# Altium PCB PCBkurs.PcbDoc
Units mm, origin at the board's own origin, x right, y up, seen from the top; angles counter-clockwise.
Board outline 62.5 x 36 mm, 2 copper layers (Top Layer, Bottom Layer), stack 1.571 mm thick; 26 components, 22 nets, 154 pads, 21 vias.
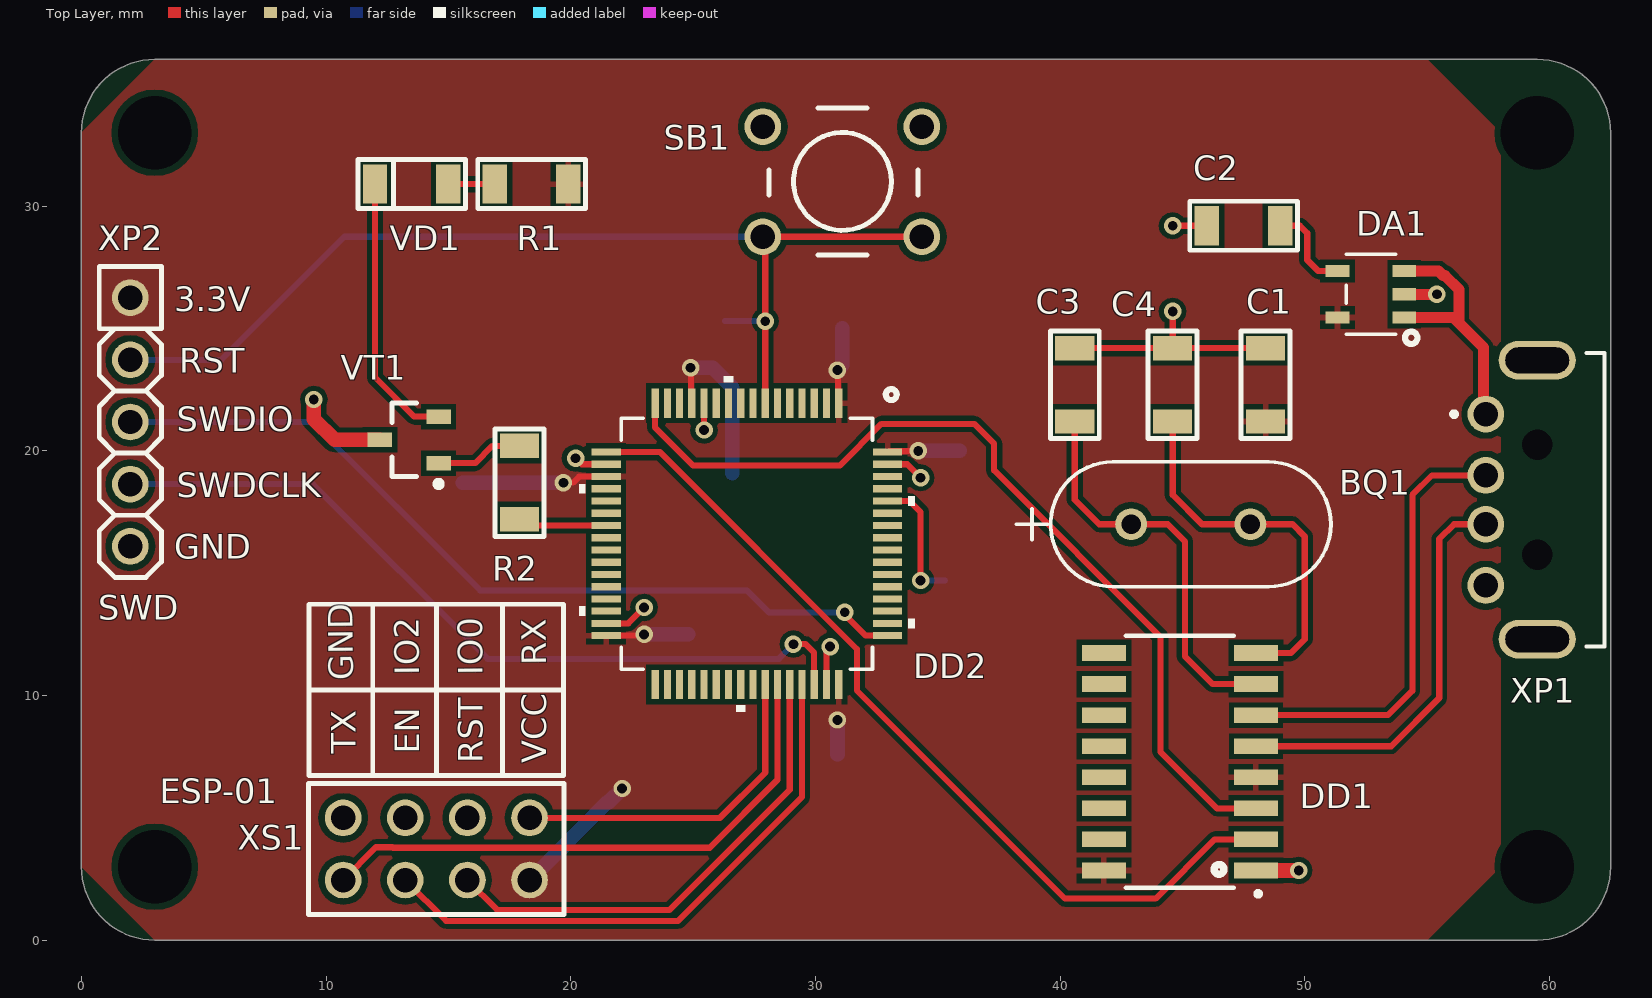
[diagram p0: Top Layer view]
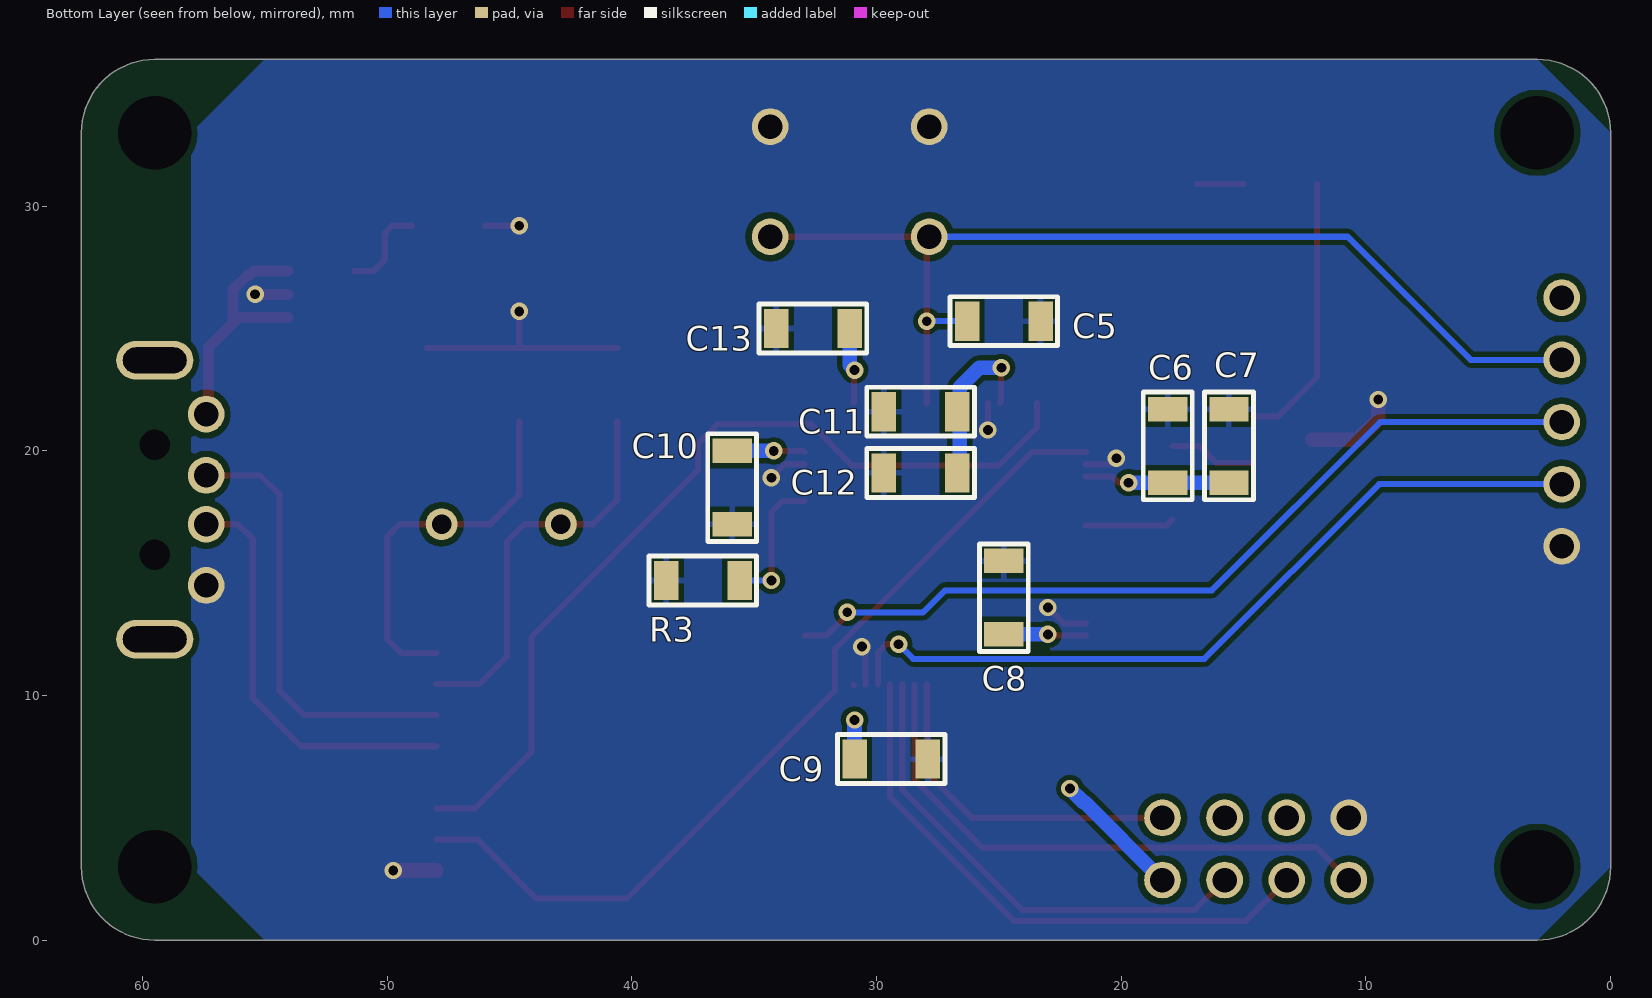
[diagram p1: Bottom Layer view, seen from below]
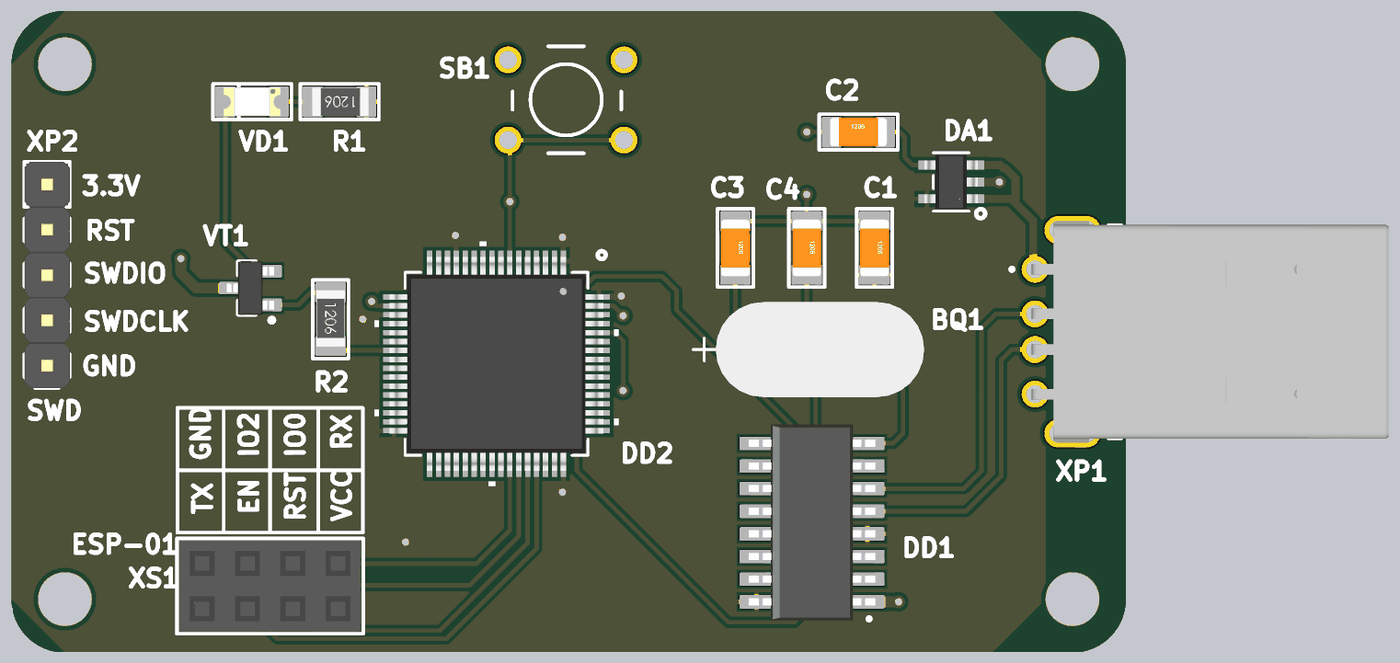
[diagram p2: 3D render of the assembled board from above, using the file's embedded part models]
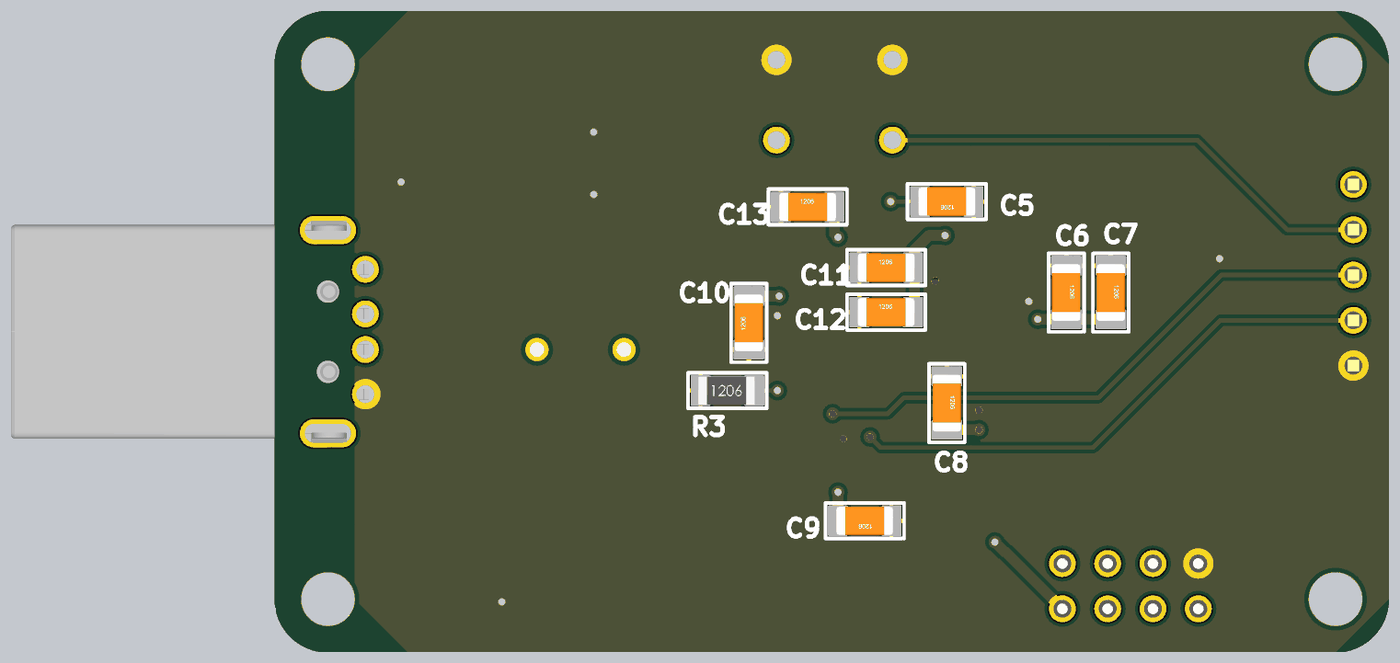
[diagram p3: 3D render of the assembled board from below, using the file's embedded part models]

## Layer stack, top to bottom
Top Solder: solder mask 0.0102, Solder Resist, Dk 3.5
Top Layer: signal copper 0.0356
Dielectric 1: dielectric 1.5, FR-4, Dk 4.8
Bottom Layer: signal copper 0.0356
Bottom Solder: solder mask 0.0102, Solder Resist, Dk 3.5

## Board outline
3,0 cw(c3,3) 0,3 0,33 cw(c3,33) 3,36 59.5,36 cw(c59.5,33) 62.5,33 62.5,3 cw(c59.5,3) 59.5,0

## Design rules (kind name [scope] priority, off if disabled: settings)
Clearance [All] p1: gap=0.195 ignorepadtopadclearanceinfootprint=FALSE except(0.21: SMDPad-Fill SMDPad-Poly SMDPad-Region; 0.255: THPad-Fill THPad-Poly THPad-Region THPad-Hole)
PasteMaskExpansion [All] p1: expansion=0.06
PolygonConnect [All] p1: thpad.connectstyle=Direct thpad.reliefconductorwidth=0.254 thpad.reliefentries=4 thpad.polygonreliefangle="90 Angle" thpad.airgapwidth=0.254 smdpad.connectstyle=Relief smdpad.reliefconductorwidth=0.25 smdpad.reliefentries=4 smdpad.polygonreliefangle="90 Angle" smdpad.airgapwidth=0.21 via.connectstyle=Direct via.reliefconductorwidth=0.254 via.reliefentries=4 via.polygonreliefangle="90 Angle" via.airgapwidth=0.254
RoutingVias [All] p1: holewidth=0.6 width=0.4 viastyle="Through Hole" minholewidth=0.6 minwidth=0.4 maxholewidth=0.6 maxwidth=0.4
SolderMaskExpansion [All] p1: expansion=0.1
Width [All] p1: maxlimit=0.6 minlimit=0.25 preferedwidth=0.45 minimp=50.000000 maximp=50.000000 favimp=50.000000
29 further rules are at their usual default settings.

## Components (designator, comment, footprint, x,y, rotation, side; value= is the part's Value field where it differs from the comment)
BQ1 "12МГц" XTAL_HC49S_MTC 42.9,17 r0 top
C1 "Ceramic capacitor, 2.2мкФ, X7R, ±10%, 50V, 1206, -55...+125°C" "CAP: 1206" 48.4,22.7 r270 top value=2.2мкФ
C2 "Ceramic capacitor, 470пФ, X7R, ±10%, 50V, 1206, -55...+125°C" "CAP: 1206" 47.5,29.2 r0 top value=470пФ
C3 "Ceramic capacitor, 22пФ, X7R, ±10%, 50V, 1206, -55...+125°C" "CAP: 1206" 40.6,22.7 r270 top value=22пФ
C4 "Ceramic capacitor, 22пФ, X7R, ±10%, 50V, 1206, -55...+125°C" "CAP: 1206" 44.6,22.7 r270 top value=22пФ
C5 "Ceramic capacitor, 0,1мкФ, X7R, ±10%, 50V, 1206, -55...+125°C" "CAP: 1206" 24.8,25.3 r0 bottom value=0,1мкФ
C6 "Ceramic capacitor, 1мкФ, X7R, ±10%, 50V, 1206, -55...+125°C" "CAP: 1206" 18.1,20.2 r270 bottom value=1мкФ
C7 "Ceramic capacitor, 0,1мкФ, X7R, ±10%, 50V, 1206, -55...+125°C" "CAP: 1206" 15.6,20.2 r270 bottom value=0,1мкФ
C8 "Ceramic capacitor, 0,1мкФ, X7R, ±10%, 50V, 1206, -55...+125°C" "CAP: 1206" 24.8,14 r270 bottom value=0,1мкФ
C9 "Ceramic capacitor, 0,1мкФ, X7R, ±10%, 50V, 1206, -55...+125°C" "CAP: 1206" 29.4,7.4 r0 bottom value=0,1мкФ
C10 "Ceramic capacitor, 0,1мкФ, X7R, ±10%, 50V, 1206, -55...+125°C" "CAP: 1206" 35.9,18.5 r90 bottom value=0,1мкФ
C11 "Ceramic capacitor, 1мкФ, X7R, ±10%, 50V, 1206, -55...+125°C" "CAP: 1206" 28.2,21.6 r180 bottom value=1мкФ
C12 "Ceramic capacitor, 0,1мкФ, X7R, ±10%, 50V, 1206, -55...+125°C" "CAP: 1206" 28.2,19.1 r180 bottom value=0,1мкФ
C13 "Ceramic capacitor, 0,1мкФ, X7R, ±10%, 50V, 1206, -55...+125°C" "CAP: 1206" 32.6,25 r180 bottom value=0,1мкФ
DA1 "MIC5219-3.3YM5-TR" SOT-23-5_M5_MCH 52.7,26.4 r180 top
DD1 "CH340G" SOIC127P700X210-16N 44.895,7.295 r180 top
DD2 "STM32F100RBT6B" LQFP64-10x10mm 27.2,16.2 r270 top
R1 "Resistor film, ?кОм, ±5%, 1206, 0.25W, -55...+125°C" "RES: 1206" 18.4,30.9 r180 top value=?кОм
R2 "Resistor film, ?кОм, ±5%, 1206, 0.25W, -55...+125°C" "RES: 1206" 17.9,18.7 r270 top value=?кОм
R3 "Resistor film, 10кОм, ±5%, 1206, 0.25W, -55...+125°C" "RES: 1206" 37.1,14.7 r180 bottom value=10кОм
SB1 "Tactile button, 6x6mm" "BUT: 6x6" 31.1,31 r0 top
VD1 "LED, *, *, *, -55...+150°C" "LED: 1206G" 13.5,30.9 r180 top
VT1 "NPN transistor, 45V, 100mA, 100MHz, 300mW, 0.6V, 420, SOT-23, -55...+125°C" SOT23 13.4,20.45 r180 top
XP1 "48037-0001" MOLEX_48037-0001 59.5,18 r90 top
XP2 "Connector, 5pin, 2.54mm, 500VAC, 3A" "CON: PLS-5" 2,21.18 r270 top
XS1 "Connector, 8pin, 2.54mm, 500VAC, 3A" "CON: PBD-8 - ESP-01" 14.507,3.73 r0 top

## Footprints (in the part's own frame and the unit in brackets; to place one, negate y for a bottom-side part, rotate by r counter-clockwise, add the part's x,y. Pads: shape width x height; smd on the part's side, far side on the other; paste and mask are expansions set on the pad)
"BUT: 6x6" [mm] "Leaded Tactile Button 6x6"
  round 1.5 hole 1: 1(-3.25,2.25) 1(3.25,2.25) 2(-3.25,-2.25) 2(3.25,-2.25)
  silkscreen extent -3,-2.99 3.1,3.01, body extent -3.15,-2.96 3.25,3.04, height 4.5
"CAP: 1206" [mm]
  rect 1x1.6 smd: 1(-1.5,0) 2(1.5,0)
  silkscreen extent -2.2,-1 2.2,1, body extent -1.6,-0.8 1.6,0.8, height 1
"CON: PBD-8 - ESP-01" [mm] "PBD-8"
  round 1.5 hole 1: 1(3.81,-1.27) 2(-1.27,-1.27) 3(1.27,-1.27) 4(-3.81,-1.27) 5(3.81,1.27) 6(1.27,1.27) 7(-1.27,1.27) 8(-3.81,1.27)
  silkscreen extent -5.23,-2.68 5.23,10, body extent -5.08,-2.54 5.08,2.54, height 8.5
"CON: PLS-5" [mm]
  round 1.5 hole 1: 1(-5.08,0) 2(-2.54,0) 3(0,0) 4(2.54,0) 5(5.08,0)
  silkscreen extent -6.35,-1.27 6.35,1.27, body extent -6.35,-1.27 6.35,1.27, height 8.54
"LED: 1206G" [mm]
  rect 1x1.6 smd: 1(-1.5,0) 2(1.5,0)
  silkscreen extent -2.2,-1 2.2,1, body extent -1.6,-0.8 1.6,0.8, height 1.1
LQFP64-10x10mm [mm]
  rect 1.194x0.295 smd paste+0 mask+0: 1(-5.75,3.75) 2(-5.75,3.25) 3(-5.75,2.75) 4(-5.75,2.25) 5(-5.75,1.75) 6(-5.75,1.25) 7(-5.75,0.75) 8(-5.75,0.25) 9(-5.75,-0.25) 10(-5.75,-0.75) 11(-5.75,-1.25) 12(-5.75,-1.75) 13(-5.75,-2.25) 14(-5.75,-2.75) 15(-5.75,-3.25) 16(-5.75,-3.75) 33(5.75,-3.75) 34(5.75,-3.25) 35(5.75,-2.75) 36(5.75,-2.25) 37(5.75,-1.75) 38(5.75,-1.25) 39(5.75,-0.75) 40(5.75,-0.25) 41(5.75,0.25) 42(5.75,0.75) 43(5.75,1.25) 44(5.75,1.75) 45(5.75,2.25) 46(5.75,2.75) 47(5.75,3.25) 48(5.75,3.75)
  rect 0.295x1.194 smd paste+0 mask+0: 17(-3.75,-5.75) 18(-3.25,-5.75) 19(-2.75,-5.75) 20(-2.25,-5.75) 21(-1.75,-5.75) 22(-1.25,-5.75) 23(-0.75,-5.75) 24(-0.25,-5.75) 25(0.25,-5.75) 26(0.75,-5.75) 27(1.25,-5.75) 28(1.75,-5.75) 29(2.25,-5.75) 30(2.75,-5.75) 31(3.25,-5.75) 32(3.75,-5.75) 49(3.75,5.75) 50(3.25,5.75) 51(2.75,5.75) 52(2.25,5.75) 53(1.75,5.75) 54(1.25,5.75) 55(0.75,5.75) 56(0.25,5.75) 57(-0.25,5.75) 58(-0.75,5.75) 59(-1.25,5.75) 60(-1.75,5.75) 61(-2.25,5.75) 62(-2.75,5.75) 63(-3.25,5.75) 64(-3.75,5.75)
  silkscreen extent -6.85,-6.85 6.85,6.85, body extent -6,-6 6,6, height 1.6
MOLEX_48037-0001 [mm]
  round 1.5 hole 1: 1(3.5,2.1) 2(1,2.1) 3(-1,2.1) 4(-3.5,2.1)
  oval 1.575x3.15 hole 1.05 slot 2.6 at 90 deg: S1(5.7,0) S2(-5.7,0)
  round 0 hole 1.25 unplated mask+0.1: ""(-2.25,0) ""(2.25,0)
  silkscreen extent -6,-2.75 6,3.5, body extent -6.35,-17.74 6.35,2.29, height 3.25
"RES: 1206" [mm]
  rect 1x1.6 smd: 1(-1.5,0) 2(1.5,0)
  silkscreen extent -2.2,-1 2.2,1, body extent -1.65,-0.8 1.55,0.8, height 0.47
SOIC127P700X210-16N [mm]
  rect 1.8x0.64 smd: 1(-3.105,4.445) 2(-3.105,3.175) 3(-3.105,1.905) 4(-3.105,0.635) 5(-3.105,-0.635) 6(-3.105,-1.905) 7(-3.105,-3.175) 8(-3.105,-4.445) 9(3.105,-4.445) 10(3.105,-3.175) 11(3.105,-1.905) 12(3.105,-0.635) 13(3.105,0.635) 14(3.105,1.905) 15(3.105,3.175) 16(3.105,4.445)
  silkscreen extent -3.3,-5.15 2.2,5.5, body extent -3.56,-5.51 3.55,5.51, height 2.1
SOT23 [mm]
  rect 1x0.6 smd: 1(-1.2,0.95) 2(-1.2,-0.95) 3(1.2,0)
  round 0.5 on Mech1: ""(-0.9,1.1)
  silkscreen extent -1.33,-1.5 0.7,1.92, body extent -1.32,-1.52 1.32,1.52, height 1.12
SOT-23-5_M5_MCH [mil]
  rect 38.28x20 smd paste+0 mask+0: 1(-53.64,37.4) 2(-53.64,0) 3(-53.64,-37.4) 4(53.64,-37.4) 5(53.64,37.4)
  silkscreen extent -75,-64 40,80, body extent -59,-59 59,59, height 51
XTAL_HC49S_MTC [mm]
  round 1.3 hole 0.8 mask+0: 1(0,0) 2(4.88,0)
  silkscreen extent -4.68,-2.55 8.17,2.55, body extent -3.4,-2.67 8.28,2.67, height 3.99

## Part data
BQ1: library part HC49S-3.579545-30-50-70-20-ATF, "No Description Available", Built_By=EMA_Cory, Copyright="Copyright (C) 2018 Accelerated Designs. All rights reserved", Datasheet=http://www.farnell.com/datasheets/2877048.pdf?_ga=2.121813835.1157864053.1580138817-1514888881.1564406863&_gac=1.120882810.1579736795.CjwKCAiAgqDxBRBTEiwA59eENzGctPLsmK0lEgc5JdFCaIFHaXFzPPrx8ISHe61xJTDsw4XzCmNmYxoC7akQAvD_BwE, Manufacturer_Part_Number=HC49S-3.579545-30-50-70-20-ATF, RefDes=RefDes, SourceLibrary=Multicomp_2020_05_26, Type=DEV, Vendor=Multicomp
C1 C2 C3 C4 C5 C6 C7 C8 C9 C10 C11 C12 C13: library part Ceramic_1206, Manufacturer=Yageo, Package=1206, PartNumber=CC1206KRX7R9BB104, Temperature=-55...+125°C, Tolerance=±10%, TypeCapacitor="Ceramic capacitor", TypeDielectric=X7R, Voltage=50V, HelpURL=https://www.digikey.com/product-detail/en/yageo/CC1206KRX7R9BB104/311-1179-1-ND/303089
  C1: ValueManufacturerPartNumber="Ceramic capacitor, 2.2мкФ, X7R, ±10%, 50V, 1206, -55...+125°C"
  C2: ValueManufacturerPartNumber="Ceramic capacitor, 470пФ, X7R, ±10%, 50V, 1206, -55...+125°C"
  C3 C4: ValueManufacturerPartNumber="Ceramic capacitor, 22пФ, X7R, ±10%, 50V, 1206, -55...+125°C"
  C5 C7 C8 C9 C10 C12 C13: ValueManufacturerPartNumber="Ceramic capacitor, 0,1мкФ, X7R, ±10%, 50V, 1206, -55...+125°C"
  C6 C11: ValueManufacturerPartNumber="Ceramic capacitor, 1мкФ, X7R, ±10%, 50V, 1206, -55...+125°C"
DA1 DD2: "No Description Available", Copyright="Copyright (C) 2018 Accelerated Designs. All rights reserved", RefDes=RefDes, Type=DEV
  DA1: Built_By=EMA_Jessica, Manufacturer_Part_Number=MIC5219-3.3YM5-TR, SourceLibrary=Microchip_2019-08-23_3, Vendor=Microchip
  DD2: Manufacturer_Part_Number=STM32F100RBT6B, SourceLibrary=STMicroelectronics_2020-10-07, Vendor=STMicroelectronics
DD1: "Optoisolator Transistor Output 3750Vrms 4 Channel 16-SOP", Package="SOP-16 Vishay", Availability=Warning, MF="Vishay Semiconductor", MP=TCMT4600T0, Price=None, Purchase-URL=https://pricing.snapeda.com/search/part/TCMT4600T0/?ref=eda, SnapEDA_Link=https://www.snapeda.com/parts/TCMT4600T0/Vishay%20Semiconductor%20Opto%20Division/view-part/446869/?ref=snap
R1 R2 R3: library part Resistor_1206, Manufacturer=Yageo, Package=1206, PartNumber=RC1206JR-07100RL, Power=0.25W, Temperature=-55...+125°C, Tolerance=±5%, TypeResistor="Resistor film", HelpURL=https://www.digikey.com/product-detail/en/yageo/RC1206JR-07100RL/311-100ERCT-ND/732153
  R1 R2: ValueManufacturerPartNumber="Resistor film, ?кОм, ±5%, 1206, 0.25W, -55...+125°C"
  R3: ValueManufacturerPartNumber="Resistor film, 10кОм, ±5%, 1206, 0.25W, -55...+125°C"
SB1: library part Button_tactile, Manufacturer="TE Connectivity", Package=6x6mm, PartNumber=FSM2JSMAATR, HelpURL=https://www.digikey.com/product-detail/en/te-connectivity-alcoswitch-switches/FSM2JSMAATR/450-1792-1-ND/3503931, TypeButton="Tactile button", ValueManufacturerPartNumber="Tactile button, 6x6mm"
VD1: library part LED_single, Color=GREEN, Temperature=-55...+150°C, TypeDiode=LED, ValueManufacturerPartNumber="LED, *, *, *, -55...+150°C"
VT1: library part BJT_NPN_123, CurrentCE=100mA, CurrentGain=420, Frequency=100MHz, Manufacturer="ON Semiconductor", MaxPower=300mW, Package=SOT-23, PartNumber=BC847CLT1G, Temperature=-55...+125°C, VoltageCE=45V, VoltageSaturation=0.6V, HelpURL=https://www.digikey.com/product-detail/en/on-semiconductor/BC847CLT1G/BC847CLT1GOSCT-ND/917836, TypeTransistor="NPN transistor", ValueManufacturerPartNumber="NPN transistor, 45V, 100mA, 100MHz, 300mW, 0.6V, 420, SOT-23, -55...+125°C"
XP1: "USB-A _USB TYPE-A_ USB 2.0 Plug Connector 4 Position Through Hole, Right Angle", Package=None, Availability=Unavailable, MF=Molex, MP=48037-0001, Price=None, SnapEDA_Link=https://www.snapeda.com/parts/48037-0001/Molex/view-part/49135/?ref=snap
XP2: library part PLS-5, CurrentMax=3A, Manufacturer=Connfly, VoltageMax=500VAC, CommentText="\"Разъем\"", HelpURL=https://www.chipdip.ru/product/pls-5, Multichannel=5pin, PartNumber=PLS-5, Pitch=2.54mm, TypeConnector=Connector, ValueManufacturerPartNumber="Connector, 5pin, 2.54mm, 500VAC, 3A"
XS1: library part PBD-8, CurrentMax=3A, Manufacturer=Connfly, VoltageMax=500VAC, CommentText="\"Разъем\"", HelpURL=https://www.chipdip.ru/product/pbd-8, Multichannel=8pin, PartNumber=PBD-8, Pitch=2.54mm, TypeConnector=Connector, ValueManufacturerPartNumber="Connector, 8pin, 2.54mm, 500VAC, 3A"

## Free pads (board coordinates)
  round 0 hole 3 mask+0.1: 1(3,3) 1(3,33) 1(59.5,3) 1(59.5,33)

## Via types
v1: diameter 0.71, hole 0.4, Top Layer to Bottom Layer, tented both sides, 21 vias

## Nets (pads, with @x,y where several pads share a name; then routed paths per layer and width w, separated by ;. In a path a pad name is that pad's centre, name@x,y a point inside that pad or via, vN(x,y) a via of type N, cw(c..) or ccw(c..) an arc to the next point about the centre after c; other vN are vias at no path point)
3,3В: C1.2 C6.2 C7.2 C8.2 C9.2 C10.2 C11.2 C12.2 C13.2 DA1.5 DD1.4 DD1.16 DD2.1 DD2.13 DD2.19 DD2.32 DD2.48 DD2.64 R1.1 XP2.1 XS1.1 | length 29.3
  Top Layer w0.25: v1(19.7,18.7) 20.1,18.7 20.35,18.95 DD2.19 ; DD2.32 22.95,12.45 v1(23,12.5) ; v1(24.9,23.4) 24.922,23.378 24.922,21.978 DD2.13 ; v1(30.9,9) v1@30.922,9.022 ; v1(30.9,23.3) 30.922,23.278 30.922,21.978 DD2.1 ; DD2.48@30.922,10.422 DD2.48 ; DD2.64 33,20 v1(34.2,20)
  Bottom Layer w0.6: C7.2 v1(19.7,18.7) ; XS1.1 21.5,5.643 21.543,5.643 v1(22.1,6.2) ; v1(23,12.5) C8.2 ; v1(24.9,23.4) 25.8,23.4 26.605,22.595 C12.2@26.605,19.095 ; C9.2@30.9,7.6 v1(30.9,9) ; v1(30.9,23.3) 31.1,23.5 C13.2 ; v1(34.2,20) C10.2
5В: DA1.1 DA1.3 XP1.1 | length 10.7
  Top Layer w0.45: DA1.1 56.07,25.45 ; DA1.3 55.468,27.35 55.643,27.175 55.721,27.175 56.3,26.596 56.3,25.22 ; XP1.1@57.3,21.5 57.3,24.22 56.3,25.22 ; 56.07,25.45 56.3,25.22 ; 56.07,25.45 56.3,25.22
GND: C1.1 C2.1 C3.1 C4.1 C5.1 C6.1 C7.1 C8.1 C9.1 C10.1 C11.1 C12.1 C13.1 DA1.2 DD1.1 DD2.12 DD2.18 DD2.31 DD2.47 DD2.63 R3.1 SB1.1 VT1.3 XP1.4 XP2.5 XS1.8 | length 24.8
  Top Layer w0.254: v1(20.2,19.7) 20.45,19.45 DD2.18 ; DD2.31 22.35,12.95 v1(23,13.6) ; v1(25.45,20.85) DD2.12 ; DD2.47 v1@30.45,11.75 ; DD2.63 33.75,19.45 v1(34.3,18.9) ; C3.1 C4.1 ; v1(44.6,25.7) C4.1 ; v1(44.6,29.2) C2.1 ; C1.1 C4.1
  Top Layer w0.45: DA1.2 v1(55.4,26.4)
  Top Layer w0.6: v1(9.5,22.1) 9.5,21.3 10.35,20.45 VT1.3 ; DD1.1 v1(49.75,2.85)
  other v1: 30.6,12
NetBQ1_1: BQ1.1 C3.2 DD1.7 | length 16.5
  Top Layer w0.254: C3.2 40.6,18 41.6,17 BQ1.1 44.4,17 45.1,16.3 45.1,11.6 46.23,10.47 DD1.7
NetBQ1_2: BQ1.2 C4.2 DD1.8 | length 15.5
  Top Layer w0.254: C4.2 44.6,18.2 45.8,17 BQ1.2 49.5,17 50,16.5 50,12.3 49.44,11.74 DD1.8
NetC2_2: C2.2 DA1.4 | length 3.7
  Top Layer w0.254: C2.2 49.8,29.2 50.1,28.9 50.1,27.8 50.55,27.35 DA1.4
NetC5_2: C5.2 DD2.7 SB1.2 XP2.2 | length 42.9
  Top Layer w0.254: DD2.7 v1(27.95,25.3) 27.95,28.65 27.85,28.75 SB1.2@34.35,28.75
  Bottom Layer w0.25: XP2.2 5.72,23.72 10.75,28.75 SB1.2@27.85,28.75 ; C5.2 v1(27.95,25.3)
NetDD1_2: DD1.2 DD2.17 | length 36.1
  Top Layer w0.25: DD2.17 23.65,19.95 31.7,11.9 31.7,10.2 40.2,1.7 43.9,1.7 46.32,4.12 DD1.2
NetDD1_3: DD1.3 DD2.16 | length 36.8
  Top Layer w0.25: DD2.16 23.45,20.95 25,19.4 31,19.4 32.7,21.1 36.5,21.1 37.3,20.3 37.3,19.2 44.1,12.4 44.1,7.7 46.41,5.39 DD1.3
NetDD1_5: DD1.5 XP1.3 | length 16.9
  Top Layer w0.254: DD1.5 53.53,7.93 55.5,9.9 55.5,16.4 56.1,17 XP1.3@57.3,17
NetDD1_6: DD1.6 XP1.2 | length 18
  Top Layer w0.25: 54.4,18.2 55.2,19 XP1.2@57.3,19
  Top Layer w0.254: DD1.6 53.4,9.2 54.4,10.2 54.4,18.2
NetDD2_23: DD2.23 R2.2 | length 3.7
  Top Layer w0.25: R2.2 18.15,16.95 DD2.23
NetDD2_42: DD2.42 XS1.5 | length 14
  Top Layer w0.254: XS1.5 26.1,5 27.95,6.85 DD2.42
NetDD2_43: DD2.43 XS1.4 | length 23.4
  Top Layer w0.254: XS1.4 12.037,3.8 12.709,3.8 12.731,3.778 25.678,3.778 28.45,6.55 DD2.43
NetDD2_44: DD2.44 XS1.3 | length 20
  Top Layer w0.254: XS1.3 16.999,1.238 24.038,1.238 28.95,6.15 DD2.44
NetDD2_45: DD2.45 XS1.2 | length 23.6
  Top Layer w0.254: XS1.2 14.908,0.789 24.389,0.789 29.45,5.85 DD2.45
NetDD2_46: DD2.46 XP2.4 | length 32.6
  Top Layer w0.25: v1(29.1,12.1) 29.6,12.1 29.95,11.75 DD2.46
  Bottom Layer w0.25: XP2.4 9.46,18.64 16.6,11.5 28.5,11.5 v1(29.1,12.1)
NetDD2_49: DD2.49 XP2.3 | length 34.6
  Top Layer w0.25: v1(31.2,13.4) 31.2,13.3 32.05,12.45 DD2.49
  Bottom Layer w0.25: XP2.3 9.42,21.18 16.3,14.3 27.2,14.3 28.1,13.4 v1(31.2,13.4)
NetDD2_60: DD2.60 R3.2 | length 5.3
  Top Layer w0.25: DD2.60 33.85,17.95 34.3,17.5 v1(34.3,14.7)
  Bottom Layer w0.25: v1(34.3,14.7) R3.2@35.3,14.7
NetR1_2: R1.2 VD1.1 | length 1.9
  Top Layer w0.25: VD1.1 R1.2
NetR2_1: R2.1 VT1.1 | length 3.6
  Top Layer w0.25: VT1.1 16.1,19.5 16.8,20.2 R2.1
NetVD1_2: VD1.2 VT1.2 | length 11.2
  Top Layer w0.25: VD1.2 12,23 13.6,21.4 VT1.2
pads on no net: DD1.9 DD1.10 DD1.11 DD1.12 DD1.13 DD1.14 DD1.15 DD2.2 DD2.3 DD2.4 DD2.5 DD2.6 DD2.8 DD2.9 DD2.10 DD2.11 DD2.14 DD2.15 DD2.20 DD2.21 DD2.22 DD2.24 DD2.25 DD2.26 DD2.27 DD2.28 DD2.29 DD2.30 DD2.33 DD2.34 DD2.35 DD2.36 DD2.37 DD2.38 DD2.39 DD2.40 DD2.41 DD2.50 DD2.51 DD2.52 DD2.53 DD2.54 DD2.55 DD2.56 DD2.57 DD2.58 DD2.59 DD2.61 DD2.62 VT1. XP1. XP1.S1 XP1.S2 XS1.6 XS1.7

## Polygon pours and split planes (outlines as drawn)
3,3В on Top Layer "Top Layer-3,3В" (solid, remove dead copper, pour order 2): 3,0 55,0 58,3 58,33 55,36 3,36 0,33 0,3
GND on Bottom Layer "Bottom Layer-GND" (solid, remove dead copper, pour order 0): 3,0 55,0 58,3 58,33 55,36 3,36 0,33 0,3

## Silkscreen, mask and mechanical layers (free items; w line width, h text height)
Top Overlay:
  lines w0.25: 33.3,22.2 cw(c33.1,22.3) 33.324,22.3
  text "3.3V" at 3.8,25.7 h1
  text "RST" at 4,23.2 h1
  text "SWDIO" at 3.9,20.8 h1
  text "SWDCLK" at 3.9,18.1 h1
  text "GND" at 3.8,15.6 h1
  text "SWD" at 0.7,13.1 h1
  text "ESP-01" at 3.2,5.6 h1
Board:
  the board outline again, w0.25

## Text inside footprints (layer, text, board x,y; h text height)
XS1: Top Overlay "TX" at 11.207,7.63 h1 r90; Top Overlay "GND" at 11.107,10.63 h1 r90.53; Top Overlay "IO2" at 13.807,10.83 h1 r90.53; Top Overlay "EN" at 13.807,7.63 h1 r90; Top Overlay "IO0" at 16.407,10.83 h1 r90.53; Top Overlay "RST" at 16.407,7.23 h1 r90; Top Overlay "RX" at 19.007,11.23 h1 r90.53; Top Overlay "VCC" at 19.007,7.23 h1 r90